# Altium PCB PCB1.PcbDoc
Units mil, origin at the board's own origin, x right, y up, seen from the top; angles counter-clockwise.
Board outline 3150 x 2860 mil, 2 copper layers (Top Layer, Bottom Layer); 10 components, 6 nets, 61 pads, 0 vias.
Unrouted connection lines stored in the file: 1.
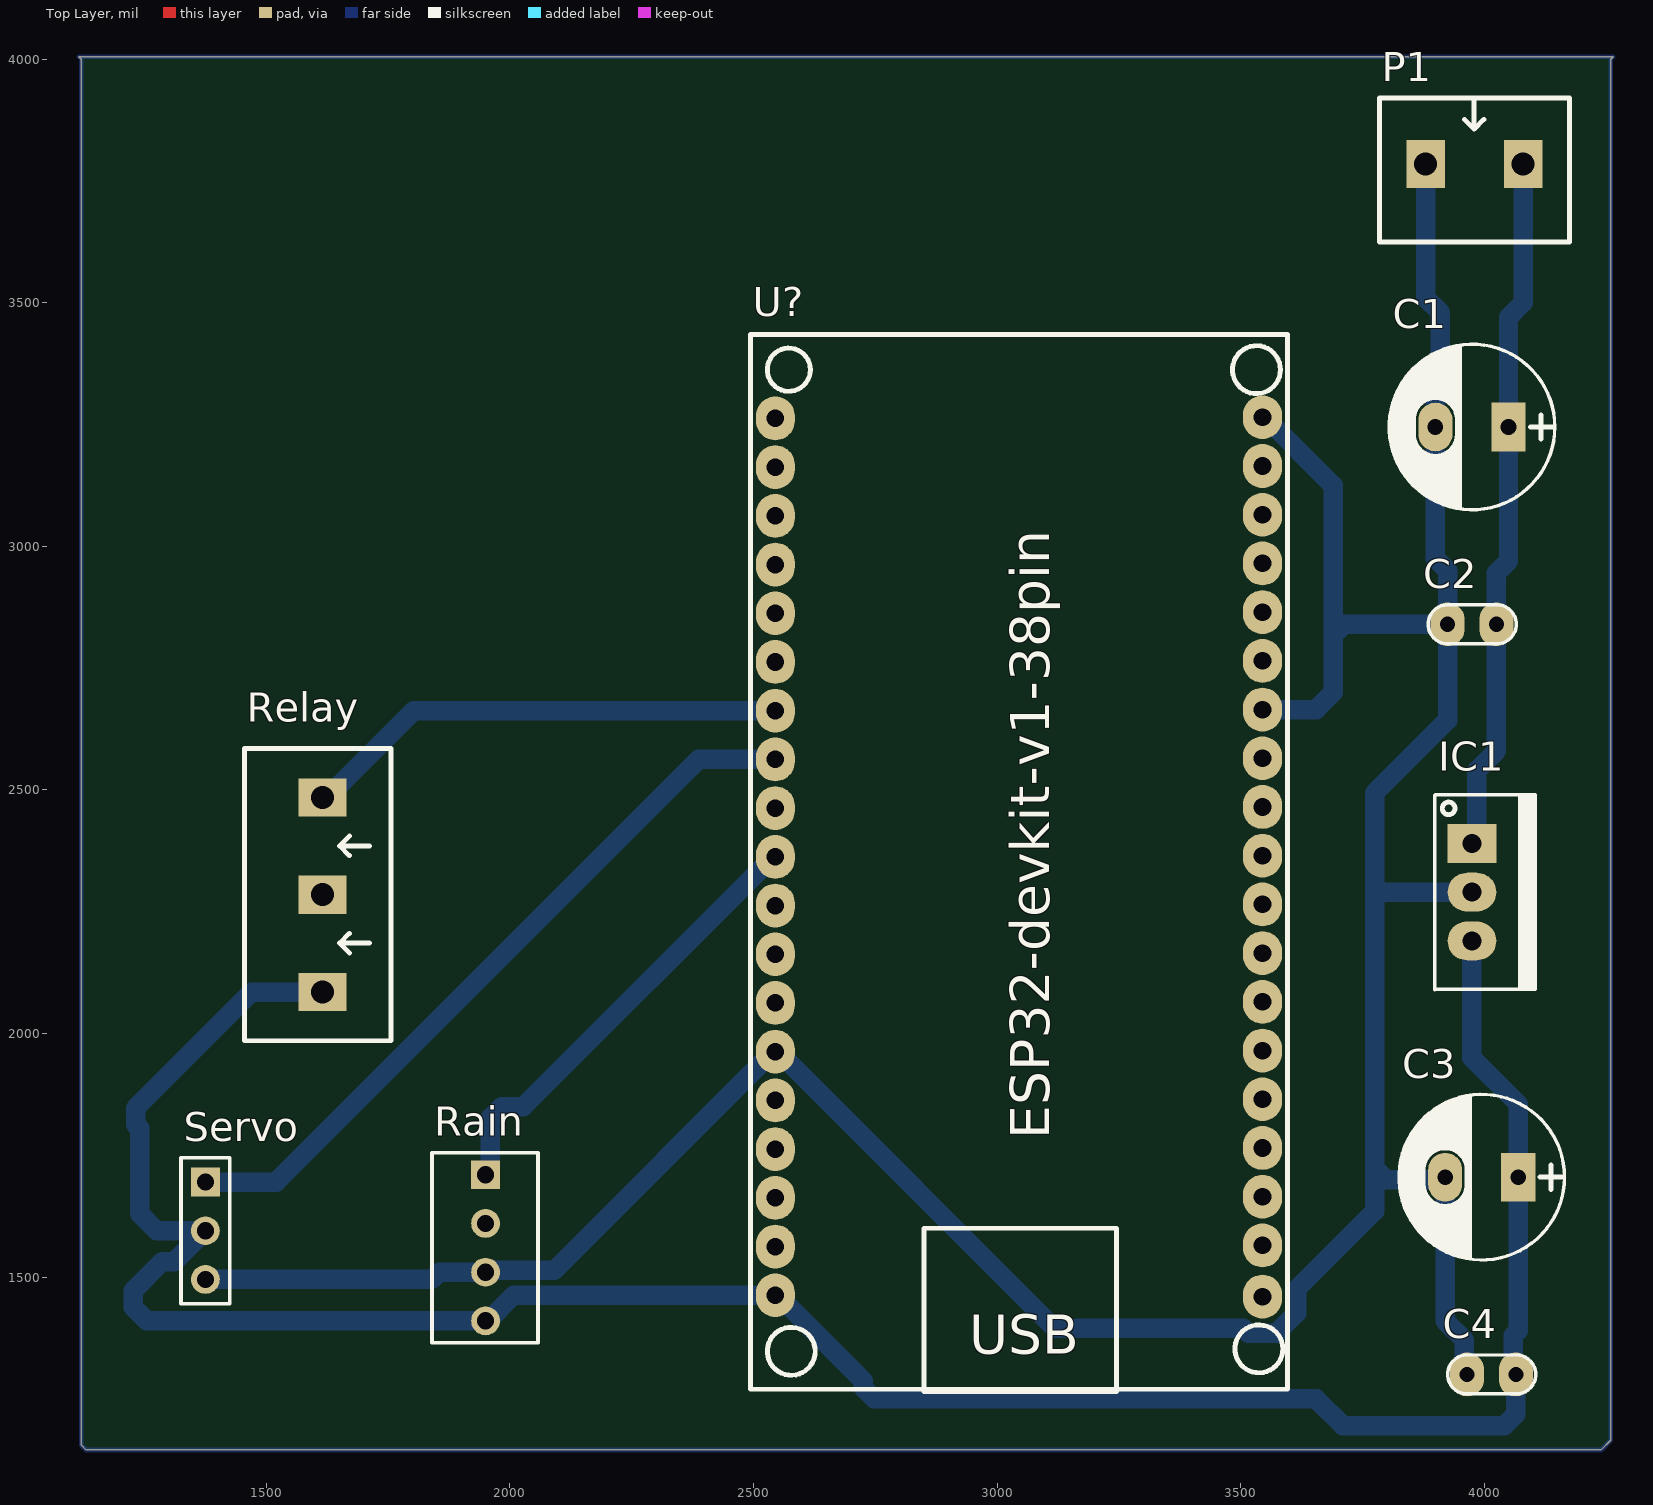
[diagram p0: Top Layer view]
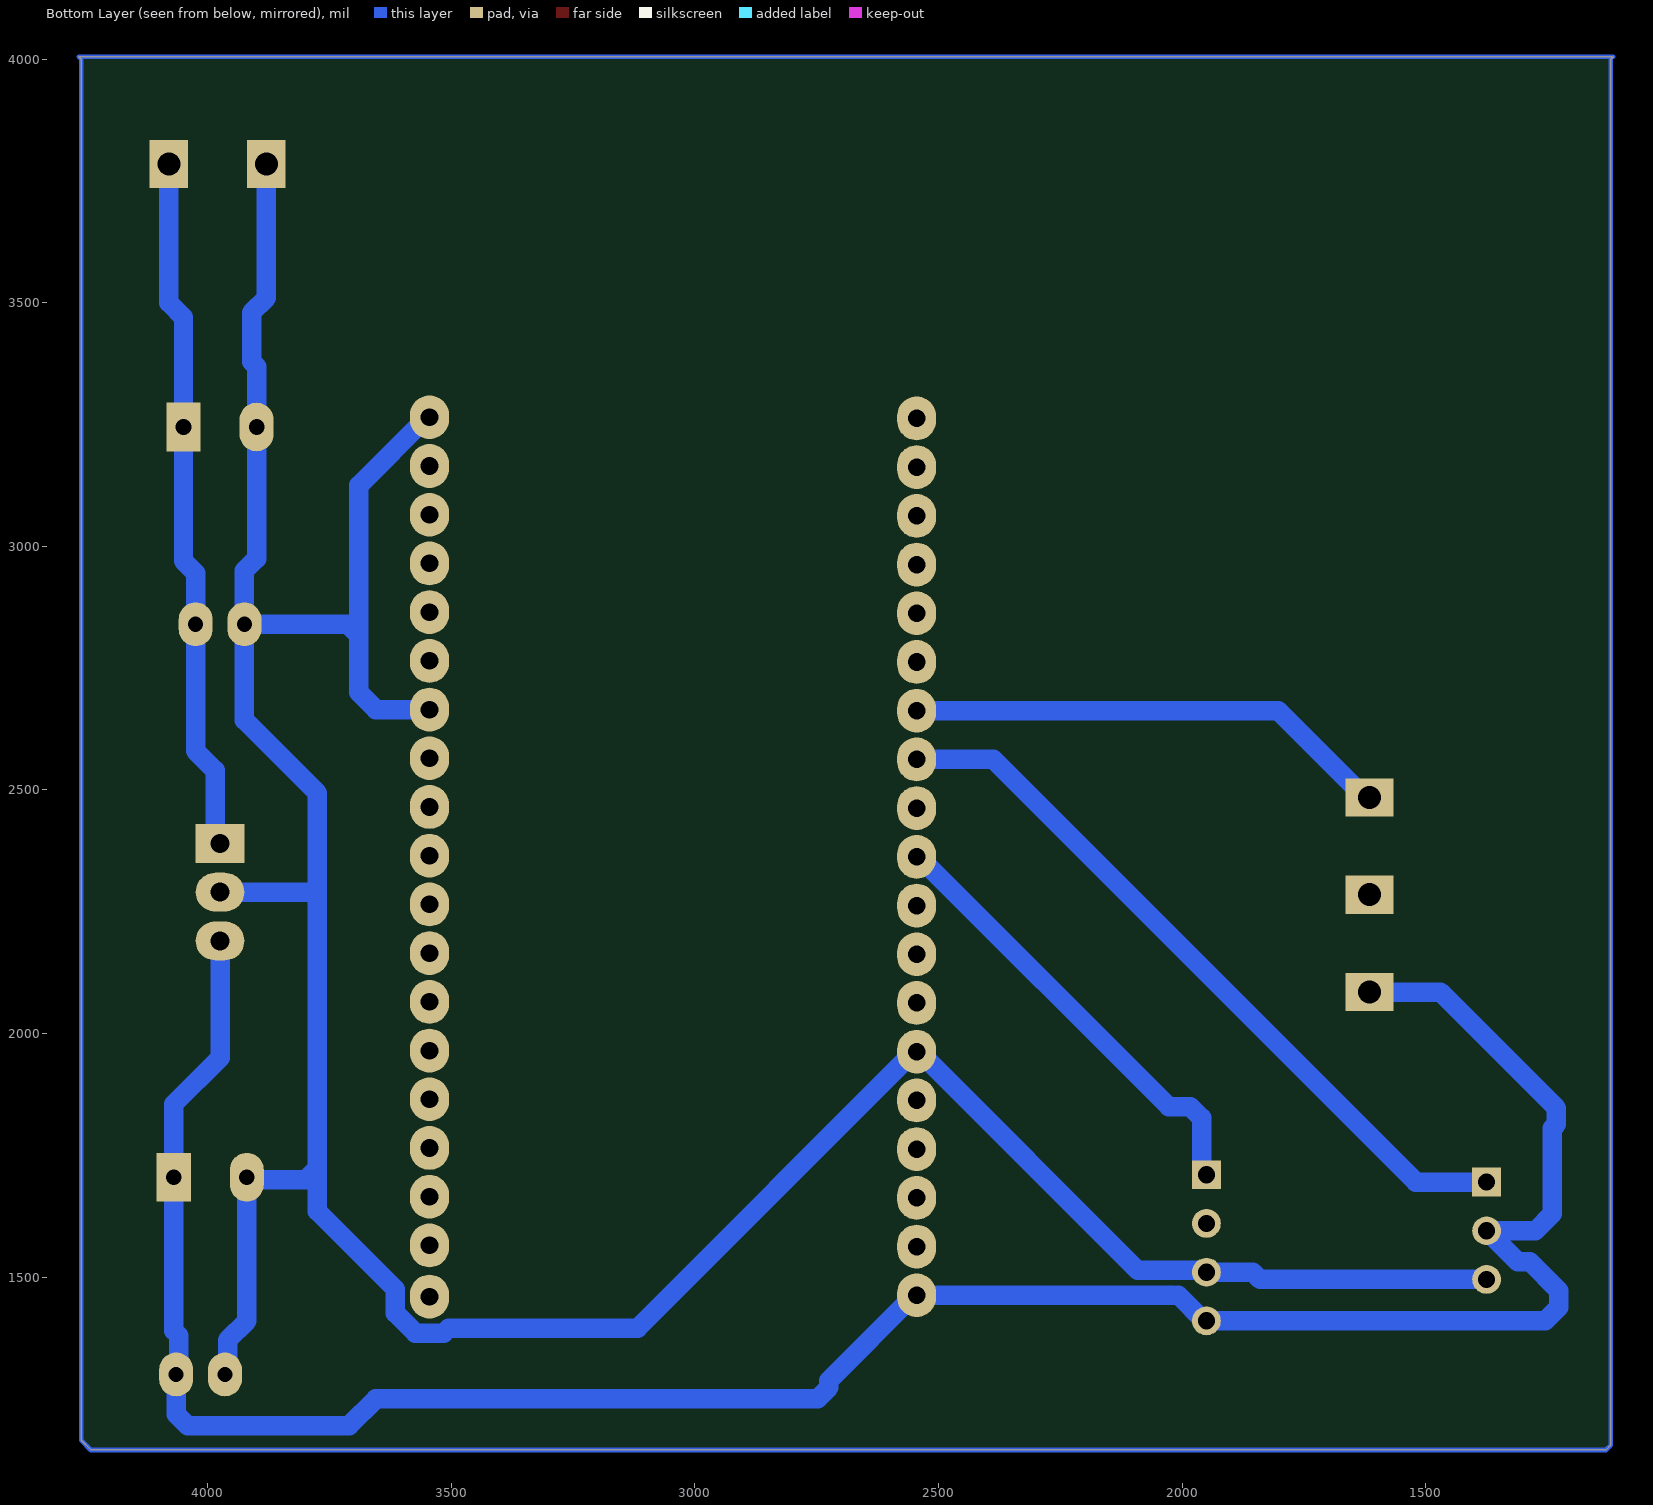
[diagram p1: Bottom Layer view, seen from below]
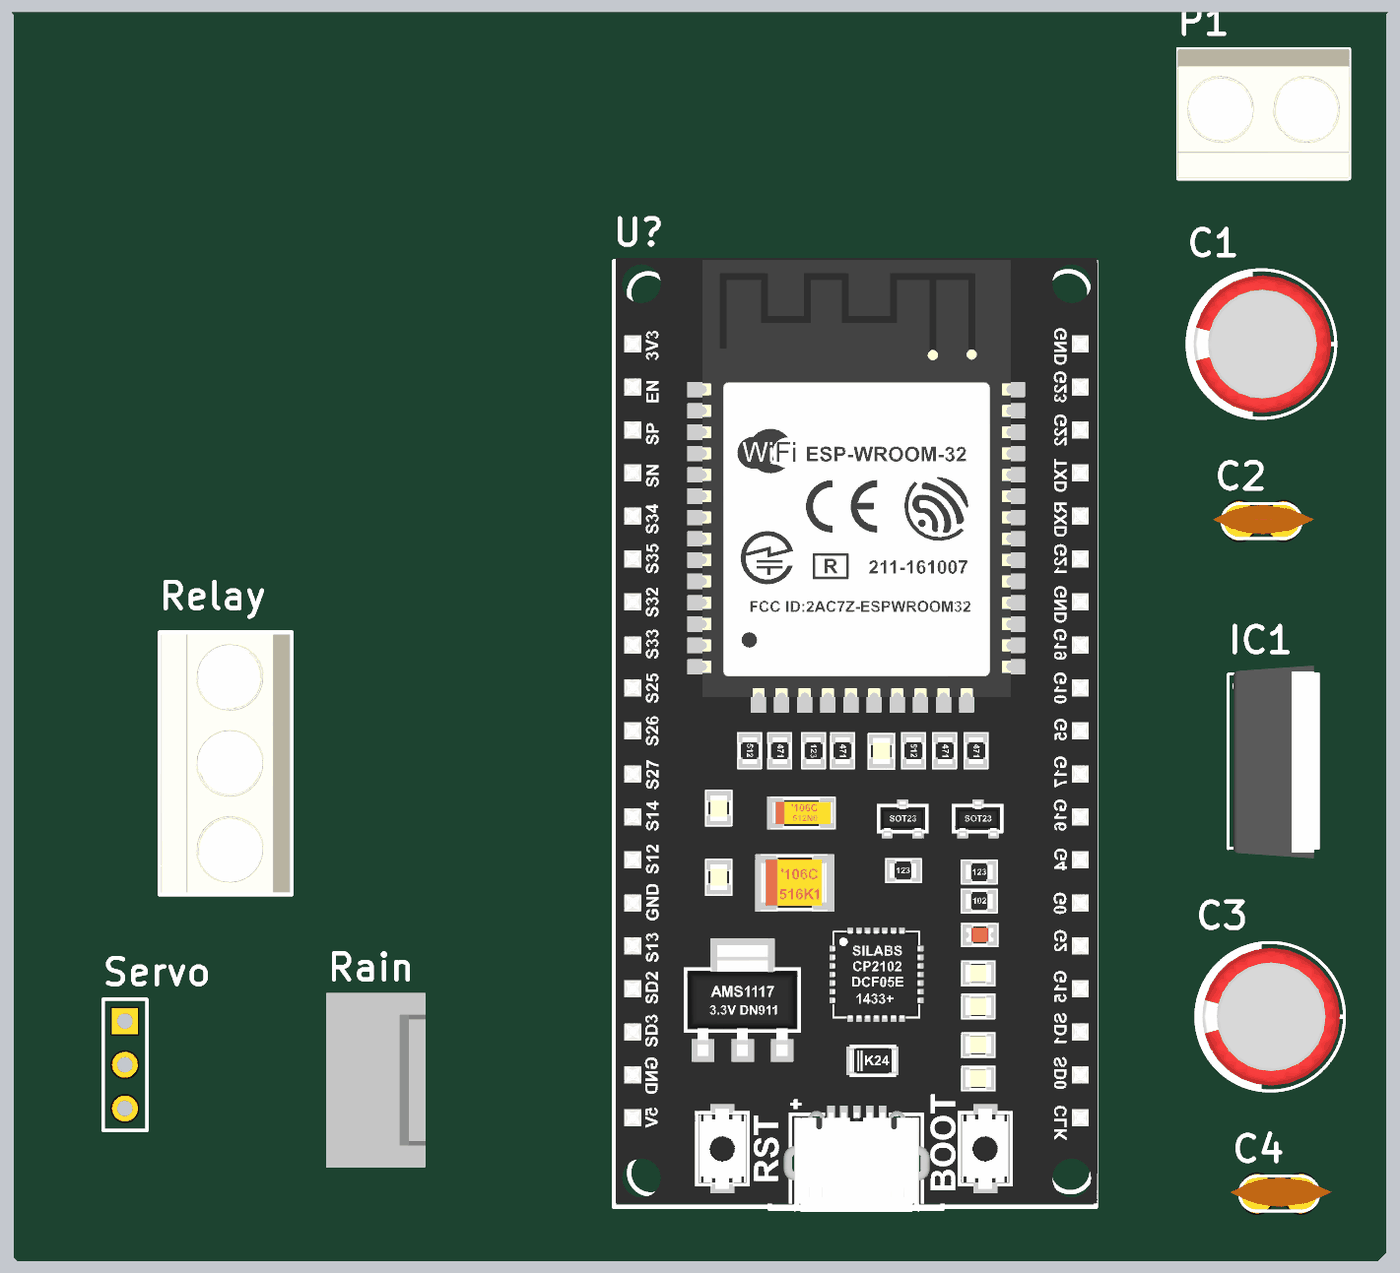
[diagram p2: 3D render of the assembled board from above, using the file's embedded part models]

## Layer stack, top to bottom
Top Solder: solder mask 0.4, Solder Resist, Dk 3.5
Top Layer: signal copper 1.4
Dielectric 1: dielectric 12.6, FR-4, Dk 4.8
Bottom Layer: signal copper 1.4
Bottom Solder: solder mask 0.4, Solder Resist, Dk 3.5

## Board outline
1130,1145 1120,1155 1120,4000 1115,4005 4265,4005 4260,4000 4260,1165 4240,1145

## Design rules (kind name [scope] priority, off if disabled: settings)
Clearance [All] p1: gap=10 ignorepadtopadclearanceinfootprint=FALSE
PolygonConnect [All] p1: connectstyle=Relief reliefconductorwidth=10 reliefentries=4 polygonreliefangle="90 Angle" airgapwidth=10
RoutingVias [All] p1: holewidth=28 width=50 viastyle="Through Hole" minholewidth=28 minwidth=50 maxholewidth=28 maxwidth=50
SolderMaskExpansion [All] p1: expansion=4 istentingtop=FALSE
SupplyNets "Schematic Supply Nets_2" [InNet('+5')] p1: voltage=0.000
SupplyNets "Schematic Supply Nets_1" [InNet('+12')] p2: voltage=0.000
SupplyNets "Schematic Supply Nets" [InNet('GND')] p3: voltage=0.000
Width [All] p1: maxlimit=100 minlimit=10 preferedwidth=40
30 further rules are at their usual default settings.

## Components (designator, comment, footprint, x,y, rotation, side; value= is the part's Value field where it differs from the comment)
C1 "100uF/35V" CP1.5/3.4 4050,3245 r180 top value=100uF/35V/50V
C2 "104" CN1 3925,2840 r0 top value=100pF
C3 "47uF/16V" CP1.5/3.4 4070,1705 r180 top value=100uF/35V/50V
C4 "104" CN1 3965,1300 r0 top value=100pF
IC1 "LM7805" QTO-220 3975,2390 r270 top
P1 "Header 2 - M" "Medium - Header 2" 3980,3785 r0 top
Rain "Header4" HDR4 1950,1710 r270 top
Relay "Header 3 - M" "Medium - Header 3" 1615,2085 r90 top
Servo "Header 3" HDR1X3 1375,1695 r270 top
U? "ESP32-DEVKI-V1.0-PIN38" ESP32-DEVKIT-V1.0-38PIN 3045,2350 r0 top

## Footprints (in the part's own frame and the unit in brackets; to place one, negate y for a bottom-side part, rotate by r counter-clockwise, add the part's x,y. Pads: shape width x height; smd on the part's side, far side on the other; paste and mask are expansions set on the pad)
CN1 [mil]
  oval 70x90 hole 31: 1(0,0) 2(100,0)
  silkscreen extent -40,-40 141,40, body extent -60,-30 170,37, height 265
CP1.5/3.4 [mil] "Tu hoa 220->470uF,16V, 470uF/16V,25V"
  rect 70x100 hole 32: 1(0,0)
  oval 70x100 hole 32: 2(150,0)
  silkscreen extent -95,-170 245,170, body extent -85,-157 230,157, height 446
ESP32-DEVKIT-V1.0-38PIN [mil] "DEVKIT 38 PIN"
  oval 80x90 hole 36: 1(-500,912.59) 2(-500,812.59) 3(-500,712.59) 4(-500,612.59) 5(-500,512.59) 6(-500,412.59) 7(-500,312.59) 8(-500,212.59) 9(-500,112.59) 10(-500,12.59) 11(-500,-87.41) 12(-500,-187.41) 13(-500,-287.41) 14(-500,-387.41) 15(-500,-487.41) 16(-500,-587.41) 17(-500,-687.41) 18(-500,-787.41) 19(-500,-887.41) 20(500,-890.09) 21(500,-785.09) 22(500,-685.09) 23(500,-585.09) 24(500,-485.09) 25(500,-385.09) 26(500,-285.09) 27(500,-185.09) 28(500,-85.09) 29(500,14.91) 30(500,114.91) 31(500,214.91) 32(500,314.91) 33(500,414.91) 34(500,514.91) 35(500,614.91) 36(500,714.91) 37(500,814.91) 38(500,914.91)
  silkscreen extent -551,-1085 551,1085, body extent -547,-1092 555,1092, height 269
HDR1X3 [mm] "Connector; Header; 3 Position"
  rect 1.5x1.5 hole 0.9: 1(0,0)
  round 1.5 hole 0.9: 2(2.54,0) 3(5.08,0)
  silkscreen extent -1.27,-1.27 6.35,1.27, body extent -1.27,-1.27 6.35,1.27, height 7
HDR4 [mm] "Connector; Header; 4 Position"
  rect 1.5x1.5 hole 0.9: 1(0,0)
  round 1.5 hole 0.9: 2(2.54,0) 3(5.08,0) 4(7.62,0)
  silkscreen extent -1.14,-2.79 8.76,2.74, body extent -1.27,-2.92 8.89,2.88, height 11.72
"Medium - Header 2" [mm]
  rect 2x2.5 hole 1.2: 1(-2.54,0) 2(2.54,0)
  silkscreen extent -4.95,-4.08 4.95,3.43, body extent -5,-4.07 5,3.43, height 10
"Medium - Header 3" [mm]
  rect 2x2.5 hole 1.2: 1(0,0) 2(5.08,0) 3(10.147,0)
  silkscreen extent -2.54,-3.58 12.7,4.06, body extent -2.42,-3.51 12.58,3.99, height 10
QTO-220 [mil] "TO-220 - 1-2-3"
  rect 80x100 hole 39: 1(0,0)
  oval 80x100 hole 39: 2(100,0) 3(200,0)
  silkscreen extent -100,-76 300,130, body extent -119,-64 322,121, height 755

## Part data
C1 C3: library part CP3, "Cap 100uF/35V - 470uF/16V", Description 1="1000uF/6,3V - 470uF/16V - 330uF - 25V", Description 2="220uF/35V - 100uF/50V - 63V - 4,7uF/200V", Description 3="22uF => 33uF100V - 3,3uF => 4,7uF/250V", Description 4="2,2uF =>3,3uF/350 - 2,2uF/400V - 1uF/450V"
C2 C4: library part CN1, "Cap np  1pF - 472pF"
IC1: library part LM78xx, "On ap +, from + 5 to + 24VDC"
P1: "Header, 2-Pin, Medium", LatestRevisionDate=17-Jul-2002, LatestRevisionNote="Re-released for DXP Platform.", Publisher="Altium Limited"
Rain: "Header IDC, 4 x 1 Pin Vertical 2.54mm Pitch (Non-Boxed, Male)", Manufacturer="W¨¹rth Elektronik eiSos GmbH", partNo=613002143121, ComponentLink1 Description=Manufacturer, ComponentLink1URL=http://www.we-online.com, ComponentLink2 Description=Datasheet, ComponentLink2URL=http://katalog.we-online.de/em/datasheet/6130xx143121.pdf, Created by="Karrer Zheng", Created Date="29 March 2013", NoPins=02
Relay: "Header, 3-Pin, Medium", LatestRevisionDate=17-Jul-2002, LatestRevisionNote="Re-released for DXP Platform.", Publisher="Altium Limited"
Servo: "Header, 3-Pin", LatestRevisionDate=17-Jul-2002, LatestRevisionNote="Re-released for DXP Platform.", Publisher="Altium Limited"

## Nets (pads, with @x,y where several pads share a name; then routed paths per layer and width w, separated by ;. In a path a pad name is that pad's centre, name@x,y a point inside that pad or via, vN(x,y) a via of type N, cw(c..) or ccw(c..) an arc to the next point about the centre after c; other vN are vias at no path point)
+5: C3.1 C4.2 IC1.3 Rain.4 Relay.1 Servo.2 U?.19 | length 5092.4
  Bottom Layer w40: Relay.1 1470,2085 1231.57,1846.57 1231.57,1813.43 1240,1805 1240,1630 1275,1595 Servo.2 1311.46,1531.46 1286.46,1531.46 1226.57,1471.57 1226.57,1438.43 1255,1410 Rain.4 1955.16,1410 2007.75,1462.59 ; 2017.75,1462.59 U?.19 2550,1462.59 2725,1287.59 2725,1273.43 2748.43,1250 3655,1250 3710,1195 4041.57,1195 4065,1218.43 C4.2 4060,1305 4060,1380 4070,1390 C3.1 4070,1855 3975,1950 IC1.3
+12: C1.1 C2.2 IC1.1 P1.2 | length 1438.5
  Bottom Layer w40: IC1.1 3985,2400 3985,2540 4025,2580 C2.2 4025,2945 4050,2970 C1.1 4050,3470 4080,3500 P1.2
GND: C1.2 C2.1 C3.2 C4.1 IC1.2 P1.1 Rain.3 Relay.2 Servo.3 U?.14 U?.32 U?.38 | length 7006.9
  Bottom Layer w40: Servo.3 1840,1495 1855,1510 Rain.3 Rain.3@1953.65,1513.65 ; Rain.3@1963.65,1513.65 2091.06,1513.65 2540,1962.59 U?.14 2550,1962.59 3117.68,1394.91 3506.01,1394.91 3516.01,1384.91 3573.99,1384.91 3615,1425.92 3615,1475 3775,1635 3775,1723.43 ; U?.32 3654.91,2664.91 3690,2700 3690,2816.57 ; U?.38 3550,3264.91 3690,3124.91 3690,2816.57 ; P1.1 3880,3510 3910,3480 3910,3379.06 3900,3369.06 C1.2 3900,2975 3925,2950 C2.1 ; C4.1 3959.26,1305.74 3959.26,1370.74 3920,1410 C3.2 3915,1700 3798.43,1700 3775,1723.43 ; IC1.2 3775,2290 ; 3690,2816.57 3713.43,2840 C2.1 ; 3775,1723.43 3775,2290 ; 3775,2290 3775,2493.44 3925,2643.44 C2.1
Rain: Rain.1 U?.10 | length 923.6
  Bottom Layer w40: Rain.1@1960,1710 1960,1826.57 1983.43,1850 2027.41,1850 2540,2362.59 U?.10
Relay: Relay.3 U?.7 | length 1003.8
  Bottom Layer w40: Relay.3 1624.84,2484.5 1802.93,2662.59 U?.7
Servo: Servo.1 U?.8 | length 1529.4
  Bottom Layer w40: Servo.1 1520,1695 2387.59,2562.59 U?.8
pads on no net: Rain.2 U?.1 U?.2 U?.3 U?.4 U?.5 U?.6 U?.9 U?.11 U?.12 U?.13 U?.15 U?.16 U?.17 U?.18 U?.20 U?.21 U?.22 U?.23 U?.24 U?.25 U?.26 U?.27 U?.28 U?.29 U?.30 U?.31 U?.33 U?.34 U?.35 U?.36 U?.37
copper on no net: | length 11989.5
  Bottom Layer w10: 1115,4005 4265,4005 4260,4000 4260,1165 4240,1145 1130,1145 1120,1155 1120,4000

## Text inside footprints (layer, text, board x,y; h text height)
U?: Top Overlay "USB" at 2942.64,1342.59 h80; Top Overlay "ESP32-devkit-v1-38pin" at 3107.64,1782.59 h80 r90